# Altium PCB PhoneBLE_v101.PcbDoc
Units mm, origin at the board's own origin, x right, y up, seen from the top; angles counter-clockwise.
Board outline 35 x 20 mm, 2 copper layers (Top Layer, Bottom Layer); 49 components, 39 nets, 227 pads, 111 vias.
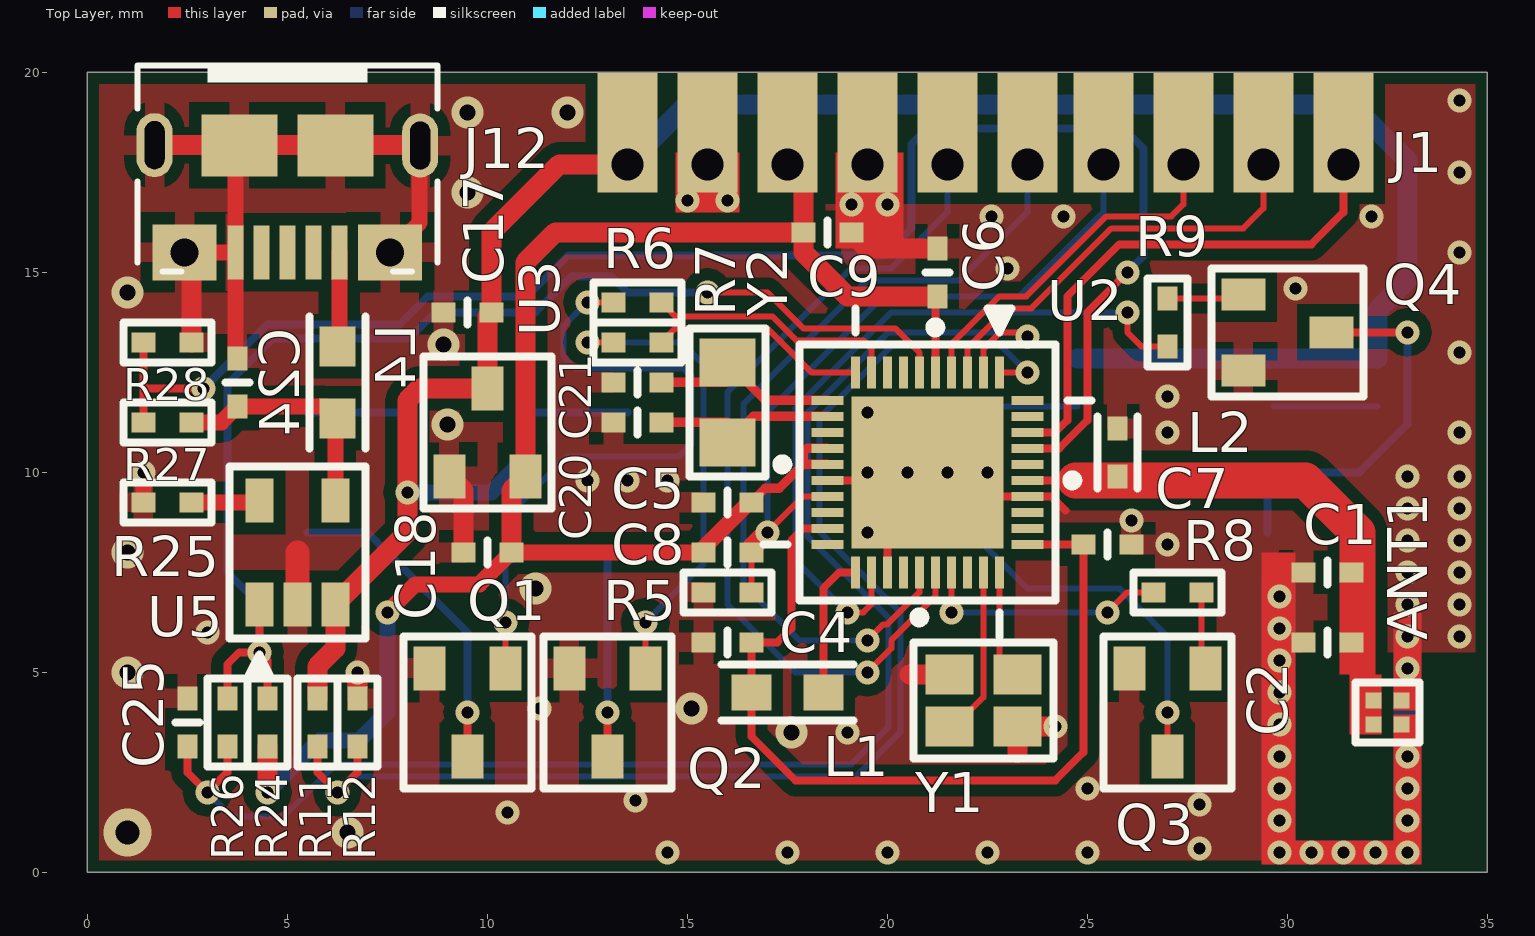
[diagram p0: Top Layer view]
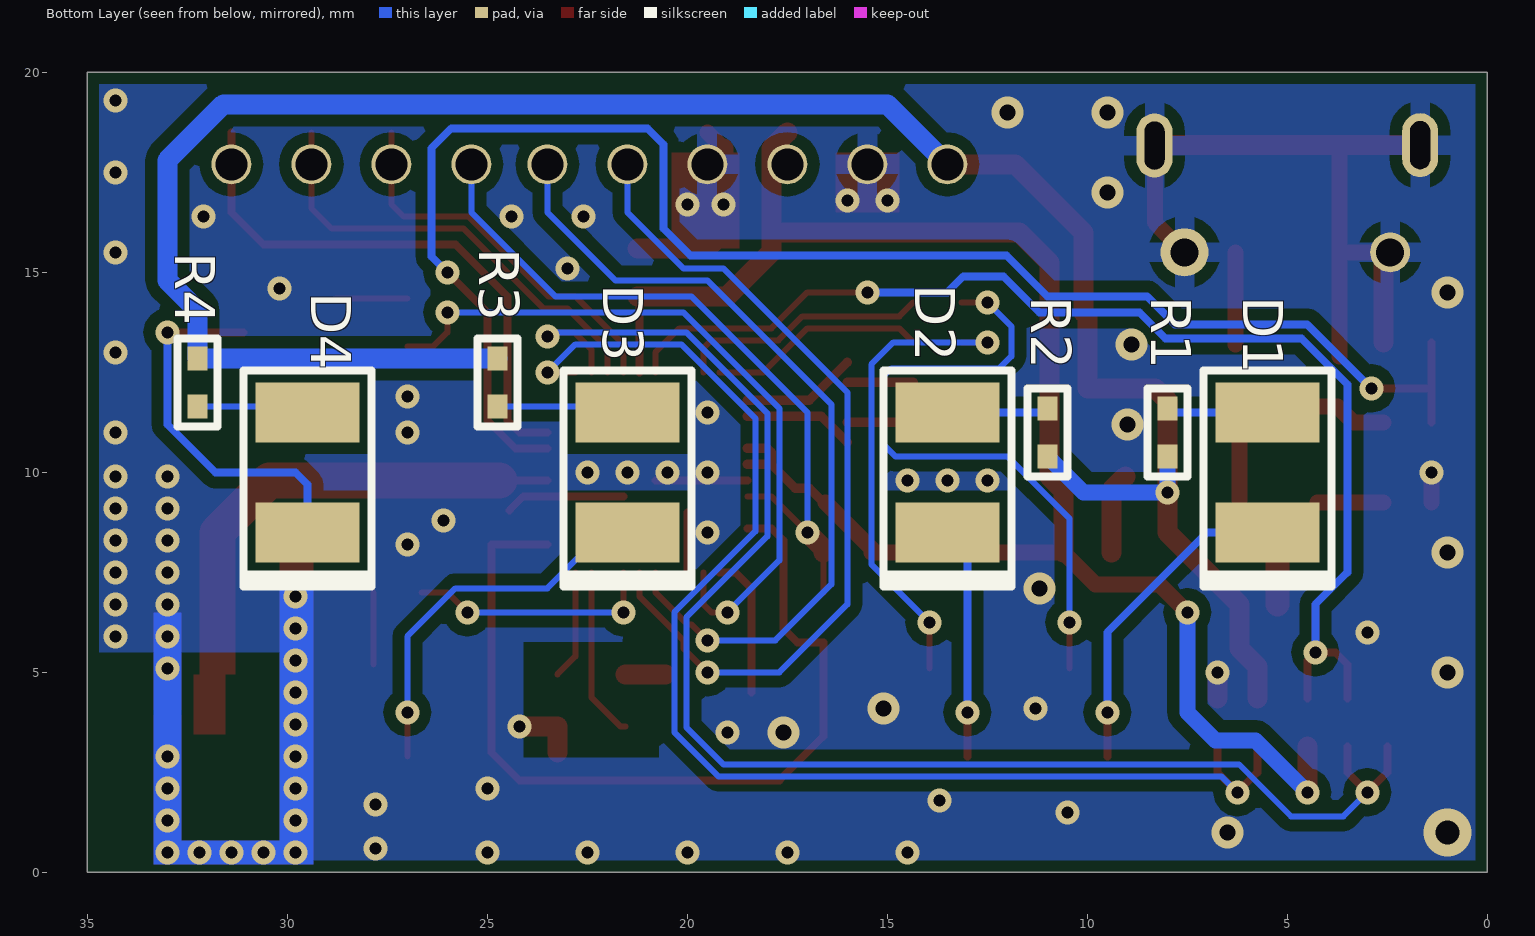
[diagram p1: Bottom Layer view, seen from below]
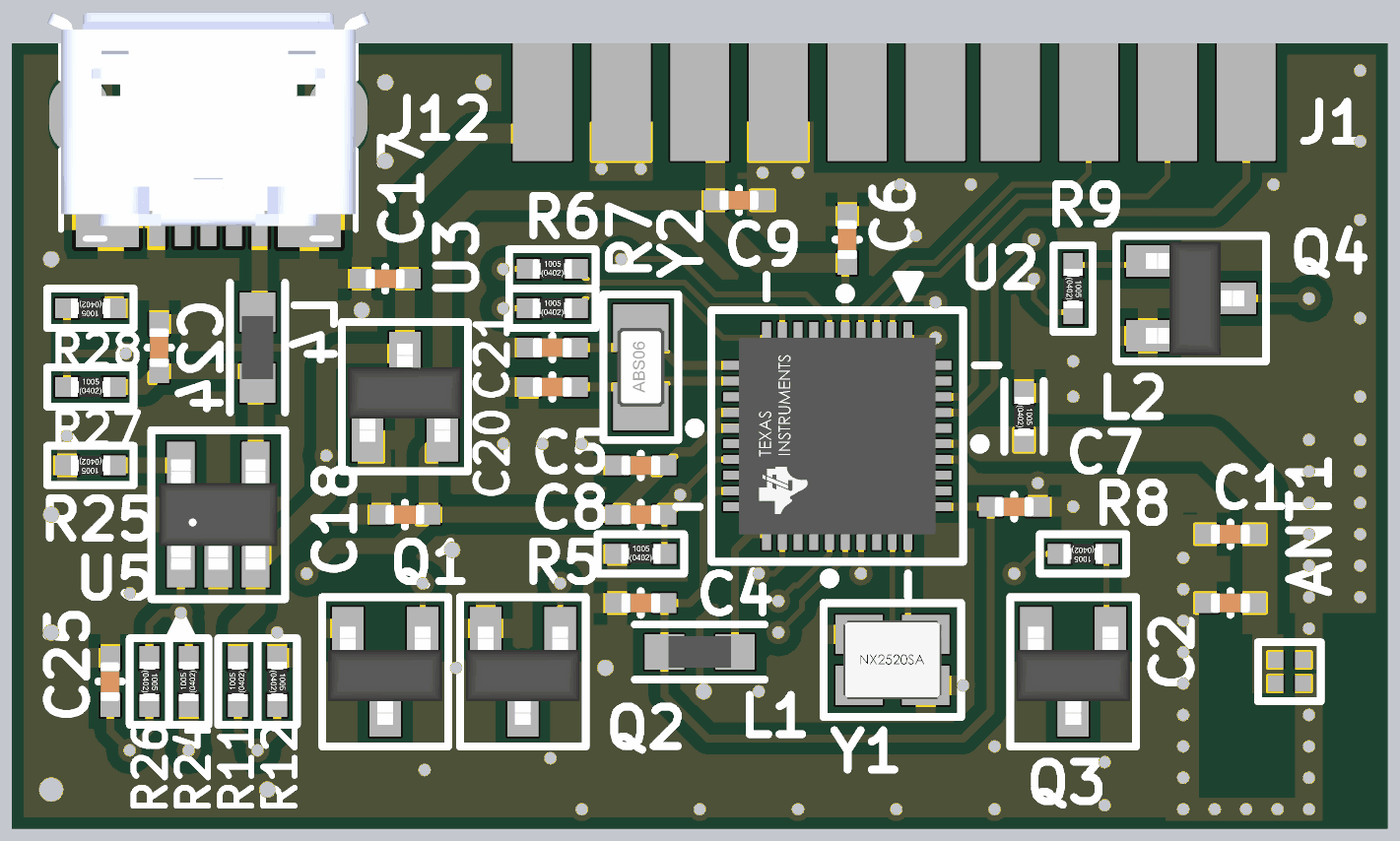
[diagram p2: 3D render of the assembled board from above, using the file's embedded part models]
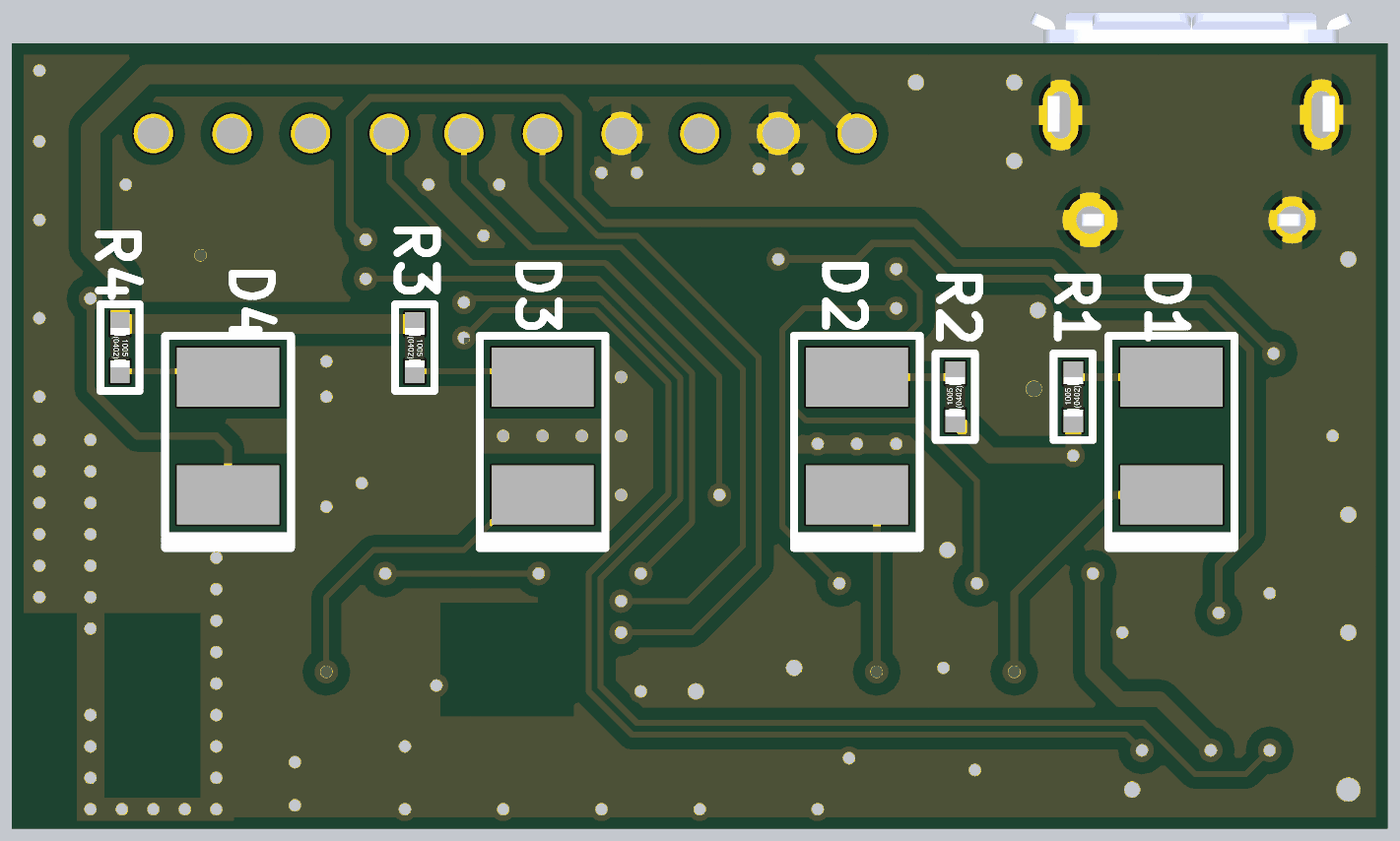
[diagram p3: 3D render of the assembled board from below, using the file's embedded part models]

## Layer stack, top to bottom
Top Layer: signal copper 0.0356
Dielectric: dielectric 0.32, FR-4, Dk 4.8
Bottom Layer: signal copper 0.0356

## Board outline
0,0 35,0 35,20 0,20

## Design rules (kind name [scope] priority, off if disabled: settings)
AssemblyTestPointUsage [All] p1 off:
AssemblyTestpoint [All] p1 off: testpointundercomponent=TRUE minsize=1.016 maxsize=2.54 preferedsize=1.524 minholesize=0 maxholesize=1.016 preferedholesize=0.813 testpointgrid=0.025 usegrid=TRUE gridtolerance=0 allowsidetop=TRUE allowsidebottom=TRUE
Clearance Clearance_Poly [InPoly] p1: gap=0.3
Clearance [All] p2: gap=0.15
ComponentClearance [All] p1 off: gap=0.1 collisioncheckmode=3 verticalgap=0.1 showdistances=FALSE
FabricationTestPointUsage [All] p1 off: valid=0 allowmultiple=FALSE
FabricationTestpoint [All] p1 off: side=3 testpointundercomponent=TRUE minsize=1.016 maxsize=2.54 preferedsize=1.524 minholesize=0 maxholesize=1.016 preferedholesize=0.813 testpointgrid=0.025 allowsidetop=TRUE allowsidebottom=TRUE usegrid=TRUE gridtolerance=0
Height [All] p1 off: minheight=0 maxheight=25.4 prefheight=12.7
HoleSize [All] p1: absolutevalues=TRUE maxlimit=5 minlimit=0.025 maxpercent=80.000 minpercent=20.000
HoleToHoleClearance [All] p1: gap=0.1 allowstackedmicrovias=TRUE
MinimumSolderMaskSliver [All] p1 off: minsoldermaskwidth=0.254
PolygonConnect PolygonConnect_via [IsVia] p1: connectstyle=Direct reliefconductorwidth=0.254 reliefentries=4 polygonreliefangle="90 Angle"
PolygonConnect [All] p2: connectstyle=Relief reliefconductorwidth=0.5 reliefentries=4 polygonreliefangle="90 Angle"
RoutingVias [All] p1: holewidth=0.3 width=0.6 viastyle="Through Hole" minholewidth=0.2 minwidth=0.4 maxholewidth=0.6 maxwidth=1.2
SilkToSilkClearance [All] p1 off: silktosilkclearance=0.254
SilkscreenOverComponentPads [IsPad] p1 off: minsilkscreentomaskgap=0.254
SolderMaskExpansion [All] p1: expansion=0.1
Width [All] p1: maxlimit=5 minlimit=0.05 preferedwidth=0.15
17 further rules are at their usual default settings.

## Components (designator, comment, footprint, x,y, rotation, side; value= is the part's Value field where it differs from the comment)
ANT1 "2450AT07A0100T" ANT1005 32.5,4 r0 top
C1 "NP" C1005 31,7.5 r0 top
C2 "NP" C1005 31,5.75 r0 top
C4 "1uF" C1005 16,5.75 r180 top
C5 "1uF" C1005 16,9.25 r0 top
C6 "100nF" C1005 21.25,15 r270 top
C7 "1uF" C1005 25.5,8.2 r180 top
C8 "1uF" C1005 16,8 r180 top
C9 "100nF" C1005 18.5,16 r180 top
C17 "1uF /6.3V" C1005 9.5,14 r0 top
C18 "1uF /6.3V" C1005 10,8 r0 top
C20 "1.5pF" C1005 13.75,11.25 r0 top
C21 "1.5pF" C1005 13.75,12.25 r0 top
C24 "1uF" C1005 3.75,12.25 r270 top
C25 "10nF" C1005 2.5,3.75 r270 top
D1 "LY T68F-U1AA-46-1-Z" T68F_Z 5.5,10 r270 bottom locked
D2 "LY T68F-U1AA-46-1-Z" T68F_Z 13.5,10 r270 bottom locked
D3 "LY T68F-U1AA-46-1-Z" T68F_Z 21.5,10 r270 bottom locked
D4 "LY T68F-U1AA-46-1-Z" T68F_Z 29.5,10 r270 bottom locked
J1 "TC2050-IDC-NL" SMD-10 22.5,18.5 r180 top locked
J12 "MicroUSB-B" FCI_10118193-0001LF 5,15.5 r270 top
L1 "BRL1608T2R2M" L1608 17.5,4.5 r180 top
L2 "HK10053N9S-T" L1005 25.75,10.5 r270 top
L4 "BLM18AG102SN1D" L1608 6.25,12.25 r270 top
Q1 "BC817" SOT-23 9.5,4 r180 top
Q2 "BC817" SOT-23 13,4 r180 top
Q3 "BC817" SOT-23 27,4 r180 top
Q4 "BC817" SOT-23 30,13.5 r270 top
R1 "470" R1005 8,11 r90 bottom
R2 "470" R1005 11,11 r90 bottom
R3 "470" R1005 24.75,12.25 r270 bottom
R4 "470" R1005 32.25,12.25 r270 bottom
R5 "4.7K" R1005 16,7 r0 top
R6 "470" R1005 13.75,14.25 r0 top
R7 "470" R1005 13.75,13.25 r0 top
R8 "470" R1005 27.25,7 r180 top
R9 "470" R1005 27,13.75 r270 top
R11 "2K" R1005 5.75,3.75 r90 top
R12 "3K" R1005 6.75,3.75 r270 top
R24 "330" R1005 4.5,3.75 r90 top
R25 "1.65K" R1005 2,9.25 r180 top
R26 "10K" R1005 3.5,3.75 r270 top
R27 "2K" R1005 2,11.25 r0 top
R28 "3K" R1005 2,13.25 r180 top
U2 "DA14583_QFN40" QFN40 21,10 r180 top locked
U3 "XC6206P332MR" SOT-23 10,11 r0 top
U5 "TP4054" SOT23-5 5.25,8 r0 top locked
Y1 "16MHz" SMD2520-4 22.4,4.3 r0 top
Y2 "32.768kHz" XTAL2012 16,11.75 r90 top

## Footprints (in the part's own frame and the unit in brackets; to place one, negate y for a bottom-side part, rotate by r counter-clockwise, add the part's x,y. Pads: shape width x height; smd on the part's side, far side on the other; paste and mask are expansions set on the pad)
ANT1005 [mm]
  rect 0.4x0.4 smd paste+0 mask+0.05: 1(-0.35,-0.3) 2(0.35,-0.3) 3(0.35,0.3) 4(-0.35,0.3)
  round 0.2 on Mech4 paste-10 mask-10: ""(0,0)
  silkscreen extent -0.8,-0.75 0.8,0.75, body extent -0.5,-0.3 0.5,0.3, height 0.5
C1005 [mm]
  rect 0.6x0.5 smd paste+0 mask+0.05: 1(-0.6,0) 2(0.6,0)
  round 0.2 on Mech4 paste-10 mask-10: ""(0,0)
  silkscreen extent 0,-0.3 0,0.3, body extent -0.5,-0.25 0.5,0.25, height 0.25
FCI_10118193-0001LF [mm]
  rect 1.35x0.4 smd: 1(0,1.3) 2(0,0.65) 3(0,0) 4(0,-0.65) 5(0,-1.3)
  oval 1.6x0.9 hole 0.5 slot 1.2 at 0 deg: 6(-2.68,-3.32) 6(-2.67,3.32)
  oval 2x1.5 on Top Paste: 6(-2.675,3.3) 6(-2.675,-3.3)
  rect 1.55x1.9 smd: 6(-2.675,1.2) 6(-2.675,-1.2)
  rect 1.4x1.6 smd: 6(0,-2.57) 6(0,2.57)
  round 1 hole 0.7: 6(0,-2.57)
  round 1.2 hole 0.7: 6(0,2.57)
  silkscreen extent -4.75,-3.75 0.48,3.75, body extent -5.28,-4.1 0.15,4.1, height 2.72
L1005 [mm]
  rect 0.6x0.5 smd paste+0 mask+0.05: 1(-0.6,0) 2(0.6,0)
  round 0.2 on Mech4 paste-10 mask-10: ""(0,0)
  silkscreen extent -0.9,-0.5 0.9,0.5, body extent -0.5,-0.25 0.5,0.25, height 0.35
L1608 [mm]
  rect 1x0.9 smd paste+0 mask+0.05: 1(-0.9,0) 2(0.9,0)
  round 0.2 on Mech4 paste-10 mask-10: ""(0,0)
  silkscreen extent -1.65,-0.7 1.65,0.7, body extent -0.8,-0.4 0.8,0.4, height 0.6
QFN40 [mm]
  rect 0.225x0.8 smd paste+0 mask+0.05: 1(-1.8,-2.5) 2(-1.4,-2.5) 3(-1,-2.5) 4(-0.6,-2.5) 5(-0.2,-2.5) 6(0.2,-2.5) 7(0.6,-2.5) 8(1,-2.5) 9(1.4,-2.5) 10(1.8,-2.5) 21(1.8,2.5) 22(1.4,2.5) 23(1,2.5) 24(0.6,2.5) 25(0.2,2.5) 26(-0.2,2.5) 27(-0.6,2.5) 28(-1,2.5) 29(-1.4,2.5) 30(-1.8,2.5)
  rect 0.8x0.225 smd paste+0 mask+0.05: 11(2.5,-1.8) 12(2.5,-1.4) 13(2.5,-1) 14(2.5,-0.6) 15(2.5,-0.2) 16(2.5,0.2) 17(2.5,0.6) 18(2.5,1) 19(2.5,1.4) 20(2.5,1.8) 31(-2.5,1.8) 32(-2.5,1.4) 33(-2.5,1) 34(-2.5,0.6) 35(-2.5,0.2) 36(-2.5,-0.2) 37(-2.5,-0.6) 38(-2.5,-1) 39(-2.5,-1.4) 40(-2.5,-1.8)
  rect 3.8x3.8 smd paste+0 mask+0.05: 41(0,0)
  round 0.2 on Mech4 paste-10 mask-10: ""(0,0)
  silkscreen extent -4.1,-4.1 4.1,4.1, body extent -2.5,-2.5 2.5,2.5, height 0.73
R1005 [mm]
  rect 0.6x0.5 smd paste+0 mask+0.05: 1(-0.6,0) 2(0.6,0)
  round 0.2 on Mech4 paste-10 mask-10: ""(0,0)
  silkscreen extent -1.1,-0.5 1.1,0.5, body extent -0.5,-0.25 0.5,0.25, height 0.35
SMD2520-4 [mm]
  rect 1.2x1 smd paste+0 mask+0.05: 1(-0.85,-0.65) 2(0.85,-0.65) 3(0.85,0.65) 4(-0.85,0.65)
  round 0.2 on Mech4 paste-10 mask-10: ""(0,0)
  silkscreen extent -1.75,-1.45 1.75,1.45, body extent -1.25,-1 1.25,1, height 0.45
SMD-10 [mm]
  rect 1.5x3 smd paste+0 mask+0.05: 1(-8.9,0) 2(-6.9,0) 3(-4.9,0) 4(-2.9,0) 5(-1,0) 6(1,0) 7(3,0) 8(5,0) 9(7,0) 10(9,0)
  round 1 hole 0.8 paste-10 mask+0.05: 1(-8.9,0.8) 2(-6.9,0.8) 3(-4.9,0.8) 4(-2.9,0.8) 5(-1,0.8) 6(1,0.8) 7(3,0.8) 8(5,0.8) 9(7,0.8) 10(9,0.8)
SOT23-5 [mm]
  rect 0.7x1.1 smd paste+0 mask+0.05: 1(-0.95,-1.3) 2(0,-1.3) 3(0.95,-1.3) 4(0.95,1.3) 5(-0.95,1.3)
  round 0.2 on Mech4 paste-10 mask-10: ""(0,0)
  silkscreen extent -1.7,-3.15 1.7,2.15, body extent -1.5,-1.4 1.5,1.4, height 1.21
SOT-23 [mm]
  rect 0.8x1.1 smd paste+0 mask+0.05: 1(-0.95,-1.1) 2(0.95,-1.1) 3(0,1.1)
  round 0.2 on Mech4 paste-10 mask-10: ""(0,0)
  silkscreen extent -1.6,-1.9 1.6,1.9, body extent -1.45,-1.15 1.45,1.35, height 1.1
T68F_Z [mm]
  rect 1.5x2.6 smd paste+0 mask+0.05: A(-1.5,0) K(1.5,0)
  round 0.2 on Mech4 paste-10 mask-10: ""(0,0)
  silkscreen extent -2.55,-1.6 2.85,1.6
XTAL2012 [mm]
  rect 1.2x1.4 smd paste+0 mask+0.05: 1(-1,0) 2(1,0)
  round 0.2 on Mech4 paste-10 mask-10: ""(0,0)
  silkscreen extent -1.85,-0.95 1.85,0.95, body extent -1,-0.6 1,0.59, height 0.61

## Via types
v1: diameter 0.6, hole 0.3, Top Layer to Bottom Layer, 98 vias
v2: diameter 0.8, hole 0.4, Top Layer to Bottom Layer, 12 vias
v3: diameter 1.2, hole 0.6, Top Layer to Bottom Layer, 1 vias

## Nets (pads, with @x,y where several pads share a name; then routed paths per layer and width w, separated by ;. In a path a pad name is that pad's centre, name@x,y a point inside that pad or via, vN(x,y) a via of type N, cw(c..) or ccw(c..) an arc to the next point about the centre after c; other vN are vias at no path point)
CHG_DRV: C25.2 R26.2 U2.2 | length 37.8
  Top Layer w0.15: U2.2 22.4,13.076 22.824,13.5 v1@23.5,13.5
  Top Layer w0.2: C25.2 2.5,2.5 v1(3,2) 3.5,2.5 R26.2
  Bottom Layer w0.15: v1(3,2) 3.6,1.4 4.908,1.4 6.208,2.7 19.1,2.7 20.025,3.625 20.025,6.375 18,8.4 18,11.476 20.024,13.5 v1@23.5,13.5
  other v1: 23.5,13.4
CHG_FULL: R24.2 R26.1 U2.6 U5.1 | length 30.9
  Top Layer w0.15: v1(15.5,14.5) 17,14.5 17.9,13.6 20.2,13.6 20.8,13 U2.6
  Top Layer w0.2: R26.1 3.5,5.2 3.8,5.5 v1(4.3,5.5) ; U5.1 v1(4.3,5.5) ; R24.2 4.5,5.3 v1(4.3,5.5)
  Bottom Layer w0.2: v1(4.3,5.5) 4.3,6.7 3.5,7.5 3.5,12.2 4.65,13.35 8.05,13.35 8.7,14 11.2,14 12.1,14.9 13.1,14.9 13.5,14.5 v1(15.5,14.5)
GND: ANT1.2 ANT1.3 C1.1 C2.1 C4.2 C5.1 C6.1 C7.1 C9.1 C17.1 C18.1 C20.1 C21.1 C24.1 C25.1 J1.7 J1.9 J12.5 J12.6@1.68,18.18 J12.6@2.43,15.5 J12.6@3.8,18.175 J12.6@6.2,18.175 J12.6@7.57,15.5 J12.6@8.32,18.17 L2.1 Q1.2 Q2.2 Q3.2 Q4.2 R5.1 R12.1 R25.2 R28.1 U2.16 U2.23 U2.34 U2.41 U3.1 U5.2 Y1.2 Y1.4 | length 37.3
  Top Layer w0.2: U2.16 U2.41@20.8,9.8 ; U2.23 U2.41@20,9 ; U2.41@21.6,9.4 U2.34 24.1,9.4 24.45,9.05
  Top Layer w0.4: R25.2 v1(1.4,10) ; J12.6@2.43,15.5 J12.5 ; C24.1@3.7,12.9 J12.5 ; J12.6@3.7,18.075 J12.5 ; J12.6@7.57,15.5 8.31,16.24 J12.6@8.31,18.18 ; J1.7@19.1,18.1 J1.7@19.5,18.5
  Top Layer w0.5: J12.6@1.68,18.18 J12.6@8.31,18.18 ; R28.1 J12.6@2.6,15.33 ; R12.1 v1(6.75,5) ; U3.1 9.4,9.55 C18.1 ; J1.7@19.1,18.1 C9.1 19.5,15.6 C6.1 ; 20.55,4.95 Y1.4 ; 23.25,3 Y1.2 v1(24.2,3.65)
  Top Layer w0.6: U5.2 5.25,8
  other v1: 14.5,0.5 17.5,0.5 20,0.5 22.5,0.5 25,0.5 29.8,0.5 30.6,0.5 31.4,0.5 32.2,0.5 33,0.5 27.8,0.6 29.8,1.3 33,1.3 10.5,1.5 27.8,1.7 13.7,1.8 25,2.1 29.8,2.1 33,2.1 29.8,2.9 33,2.9 19,3.5 29.8,3.7 11.3,4.1 29.8,4.5 33,5.1 29.8,5.3 33,5.9 34.3,5.9 3,6 29.8,6.1 33,6.7 34.3,6.7 29.8,6.9 33,7.5 34.3,7.5 27,8.2 33,8.3 34.3,8.3 19.5,8.5 26.1,8.8 33,9.1 34.3,9.1 12.5,9.8 13.5,9.8 14.5,9.8 33,9.9 34.3,9.9 19.5,10 20.5,10 21.5,10 22.5,10 27,11 34.3,11 19.5,11.5 27,11.9 34.3,13 30.2,14.6 23,15.1 34.3,15.5 22.6,16.4 24.4,16.4 32.1,16.4 19.1,16.7 20,16.7 15,16.8 16,16.8 34.3,17.5 34.3,19.3
  other v2: 6.5,1 17.6,3.5 15.1,4.1 1,5 11.2,7.1 1,8 9,11.2 8.9,13.2 1,14.5 9.5,17 9.5,19 12,19
  other v3: 1,1
LED1: R6.2 U2.9 | length 6.3
  Top Layer w0.15: R6.2 14.7,13.9 17.124,13.9 17.724,13.3 19.4,13.3 19.6,13.1 U2.9
LED2: R7.2 U2.10 | length 5.5
  Top Layer w0.15: R7.2 14.7,13.6 17,13.6 18.1,12.5 U2.10
LED3: R8.2 U2.27 | length 6.3
  Top Layer w0.15: v1(21.6,6.5) U2.27 ; v1(25.5,6.5) 26,7 R8.2
  Bottom Layer w0.15: v1(21.6,6.5) v1(25.5,6.5)
LED4: R9.2 U2.22 | length 18.1
  Top Layer w0.15: v1(19,6.5) 19.4,6.5 19.6,6.7 U2.22 ; v1(26,14) 26,13.5 26.35,13.15 R9.2
  Bottom Layer w0.15: v1(19,6.5) 17.7,7.8 17.7,11.6 20.1,14 v1(26,14)
NetC4_1: C4.1 C7.2 L1.2 U2.19 U2.31 | length 22.4
  Top Layer w0.2: U2.19 17.9,8.6 17.6,8.3 17.6,6.1 17.25,5.75 C4.1 L1.2 16.6,3.4 17.7,2.3 24.2,2.3 24.9,3 C7.2 U2.31
NetC20_2: C20.2 U2.12 Y2.1 | length 4.4
  Top Layer w0.23: C20.2 Y2.1@16,11.25 ; Y2.1 16.65,11.4 U2.12
NetC21_2: C21.2 U2.11 Y2.2 | length 4.5
  Top Layer w0.23: C21.2 Y2.2@16,12.25 ; Y2.2 16.95,11.8 U2.11
NetC24_2: C24.2 L4.2 R27.2 U5.4 | length 5.9
  Top Layer w0.4: R27.2 3.35,11.25 C24.2 5.95,11.65 L4.2 ; U5.4 L4.2@6.2,11.3
NetD1_A: D1.A R1.2 | length 2.4
  Bottom Layer w0.2: D1.A R1.2@7.9,11.5
NetD1_K: D1.K Q1.3 | length 8.1
  Top Layer w0.2: Q1.3 v1(9.5,4)
  Bottom Layer w0.2: D1.K 7,8.5 9.5,6 v1(9.5,4)
NetD2_A: D2.A R2.2 | length 2.5
  Bottom Layer w0.2: R2.2@11,11.5 D2.A
NetD2_K: D2.K Q2.3 | length 5.1
  Top Layer w0.2: Q2.3 v1(13,4)
  Bottom Layer w0.2: v1(13,4) D2.K@13,8
NetD3_A: D3.A R3.2 | length 3.1
  Bottom Layer w0.15: D3.A@21.65,11.65 R3.2
NetD3_K: D3.K Q3.3 | length 9.6
  Top Layer w0.15: Q3.3 v1(27,4)
  Bottom Layer w0.15: D3.K 22.1,8.5 23.5,7.1 25.8,7.1 27,5.9 v1(27,4)
NetD4_A: D4.A R4.2 | length 2.6
  Bottom Layer w0.15: D4.A@29.65,11.65 R4.2
NetD4_K: D4.K Q4.3 | length 9.5
  Top Layer w0.2: Q4.3 v1(33,13.5)
  Bottom Layer w0.2: D4.K 29.5,9.7 29.8,10 31.8,10 33,11.2 v1(33,13.5)
NetJ12_1: J12.1 L4.1 | length 2.3
  Top Layer w0.4: L4.1@6.3,13.2 J12.1
NetL1_1: L1.1 U2.21 | length 3.6
  Top Layer w0.2: L1.1 18.4,7.1 18.8,7.5 U2.21
NetQ1_1: Q1.1 R6.1 | length 16.5
  Top Layer w0.15: Q1.1 v1(10.45,6.25) ; v1(12.5,14.25) R6.1
  Bottom Layer w0.15: v1(10.45,6.25) 10.45,8.85 12,10.4 14.8,10.4 15.1,10.7 15.1,12.4 14.9,12.6 12.2,12.6 11.9,12.9 11.9,13.65 v1(12.5,14.25)
NetQ2_1: Q2.1 R7.1 | length 12
  Top Layer w0.15: v1(12.5,13.25) R7.1 ; Q2.1 v1(13.95,6.25)
  Bottom Layer w0.15: v1(12.5,13.25) 14.85,13.25 15.4,12.7 15.4,7.7 v1(13.95,6.25)
NetQ3_1: Q3.1 R8.1 | length 1.8
  Top Layer w0.15: Q3.1@27.85,5.2 R8.1
NetQ4_1: Q4.1 R9.1 | length 1.8
  Top Layer w0.15: R9.1 Q4.1@28.8,14.35
NetR25_1: R25.1 U5.5 | length 1.6
  Top Layer w0.4: R25.1 U5.5@4.25,9.25
NetU2_29: U2.29 Y1.1 | length 4.3
  Top Layer w0.15: Y1.1 21.675,3.65 22.4,4.375 U2.29
NetU2_30: U2.30 Y1.3 | length 2.7
  Top Layer w0.15: U2.30 22.8,5.4 Y1.3
PLUG_IN: R27.1 R28.2 U2.37 | length 40.3
  Top Layer w0.2: R27.1 1.4,12.1 ; R28.2 1.4,12.1 ; v1(2.9,12.1) 1.4,12.1 ; U2.37 24.3,10.6 25,11.3 25,14 v1(26,15)
  Bottom Layer w0.2: v1@2.903,12.097 4.505,13.7 7.809,13.7 8.509,14.4 11,14.4 12.025,15.425 19.925,15.425 20.6,16.1 20.6,18.2 21,18.6 25.9,18.6 26.4,18.1 26.4,15.4 v1(26,15)
RFIOP: ANT1.1 ANT1.4 C1.2 C2.2 L2.2 U2.35 | length 10.7
  Top Layer w0.2: U2.35 24.7,9.8
  Top Layer w0.9: 24.7,9.8 30.45,9.8 31.75,8.5 31.75,6.55
RST: C8.1 J1.4 R5.2 U2.17 | length 18.2
  Top Layer w0.15: R5.2 C8.1 ; v1(17,8.5) 17.9,9.4 U2.17
  Top Layer w0.5: C8.1 16.6,8.1 v1(17,8.5)
  Bottom Layer w0.15: v1(17,8.5) 17,11.5 19.9,14.4 23.3,14.4 25.4,16.5 J1.4@25.4,17.7
SWCLK: J1.6 U2.26 | length 21.3
  Top Layer w0.15: v1(19.5,5) 20.1,5.6 20.1,5.8 21.2,6.9 U2.26
  Bottom Layer w0.15: v1(19.5,5) 17.7,5 16,6.7 16,12 19.1,15.1 20.1,15.1 21.5,16.5 J1.6@21.5,17.7
SWDIO: J1.5 U2.25 | length 20.8
  Top Layer w0.15: v1(19.5,5.8) 19.9,6.2 20,6.2 20.8,7 U2.25
  Bottom Layer w0.15: v1(19.5,5.8) 17.8,5.8 16.4,7.2 16.4,11.7 19.5,14.8 21.8,14.8 23.5,16.5 J1.5@23.5,17.7
URX: J1.3 U2.4 | length 9.7
  Top Layer w0.15: U2.4 21.6,13.2 22.8,14.4 23.476,14.4 25.476,16.4 27.1,16.4 27.4,16.7 27.4,17.7 J1.3@27.4,18.5
UTX: J1.2 U2.3 | length 11.3
  Top Layer w0.15: U2.3 22,13.1 23,14.1 23.6,14.1 25.6,16.1 28.9,16.1 29.4,16.6 29.4,17.7 J1.2@29.4,18.5
VBAT_SEN: R11.1 R12.2 U2.1 | length 33.1
  Top Layer w0.15: U2.1 v1(23.5,12.5)
  Top Layer w0.2: R11.1 5.75,2.5 v1(6.25,2) 6.75,2.5 R12.2
  Bottom Layer w0.15: v1(6.25,2) 6.65,2.4 19.224,2.4 20.325,3.501 20.325,6.499 18.3,8.524 18.3,11.351 20.149,13.2 22.8,13.2 v1(23.5,12.5)
VCC_3V3: C5.2 C6.2 C8.2 C9.2 C18.2 J1.8 R24.1 U2.5 U2.14 U2.15 U3.2 | length 44.4
  Top Layer w0.2: U2.5 C6.2@21.2,14.4
  Top Layer w0.23: C5.2@16.55,9.25 C5.2 16.95,9.6 17.3,9.6 17.9,10.2 ; U2.15 17.9,10.2 ; U2.14 18,10.6 17.9,10.5 17.9,10.2
  Top Layer w0.4: v1(7.5,6.5) 8.2,7.2 9.8,7.2 C18.2 C8.2 ; C8.2@15.4,8.1 C5.2@16.55,9.25
  Top Layer w0.5: v1(4.5,2) R24.1 ; C18.2 10.6,9.55 U3.2 10.95,15.25 11.7,16 C9.2 ; J1.8@17.5,18.5 17.9,18.1 C9.2 ; C6.2 21.2,14.4 19,14.4 17.9,15.5 C9.2
  Bottom Layer w0.4: v1(4.5,2) 5.8,3.3 6.8,3.3 7.5,4 v1(7.5,6.5)
VCC_BAT: C17.2 J1.10 R1.1 R2.1 R3.1 R4.1 R11.2 U3.3 U5.3 | length 56.1
  Top Layer w0.5: R11.2 5.75,5.15 6.2,5.6 U5.3 8,8.5 v1(8,9.5) 8,11.8 8.3,12.1 U3.3 C17.2@10,13.9 ; C17.2 10.1,16 11.8,17.7 J1.10@13.5,17.7
  Bottom Layer w0.4: R1.1 v1(8,9.5) 10.1,9.5 R2.1
  Bottom Layer w0.5: J1.10@13.5,17.7 15,19.2 31.6,19.2 33,17.8 33,14.8 32.25,14.05 R4.1 R3.1
VPP: J1.1 U2.38 | length 14
  Top Layer w0.2: U2.38 24.2,11 24.5,11.3 24.5,14.4 25.8,15.7 30.6,15.7 31.4,16.5 31.4,17.7 J1.1@31.4,18.5
pads on no net: ANT1. C1. C2. C4. C5. C6. C7. C8. C9. C17. C18. C20. C21. C24. C25. D1. D2. D3. D4. J12.2 J12.3 J12.4 J12.6@1.7,18.175 J12.6@8.3,18.175 L1. L2. L4. Q1. Q2. Q3. Q4. R1. R2. R3. R4. R5. R6. R7. R8. R9. R11. R12. R24. R25. R26. R27. R28. U2. U2.7 U2.8 U2.13 U2.18 U2.20 U2.24 U2.28 U2.32 U2.33 U2.36 U2.39 U2.40 U3. U5. Y1. Y2.

## Polygon pours and split planes (outlines as drawn)
GND on Top Layer "Top Layer-No Net" (solid, remove dead copper): 0.3,0.3 30,0.3 30,5.5 34.7,5.5 34.7,19.7 0.3,19.7 0.3,0.3
GND on Bottom Layer "Top Layer-No Net" (solid, remove dead copper): 0.3,0.3 30,0.3 30,5.5 34.7,5.5 34.7,19.7 0.3,19.7 0.3,0.3

## Other copper
Top Layer:
  rectangle net GND: 14.7,16.5 16.3,18
  rectangle net GND: 18.7,15.6 20.4,18
  rectangle net GND: 29.35,0.2 33.3,0.8
  region net GND: 29.35,8 29.35,0.2 30.2,0.2 30.2,8
  region net RFIOP: 31.3,6.95 31.3,4.95 32.2,4.95 32.2,6.95
  region net RFIOP: 31.65,6.95 31.65,3.45 32.1,3.45 32.1,6.95
  region net RFIOP: 31.55,4.95 31.55,3.45 32.35,3.45 32.35,4.95
  region net GND: 33.35,4.05 33.35,6.5 32.65,6.5 32.65,4.05
  region net GND: 32.65,3.95 32.65,0.2 33.35,0.2 33.35,3.95
  pour cut-out: 15.15,13.5 16.9,13.5 16.9,10.05 16.85,10 15.15,10
  pour cut-out: 30.2,0.8 30.2,5.5 32.7,5.5 32.7,0.8
  pour cut-out: 20.7,2.9 24.1,2.9 24.1,5.8 20.7,5.8
Bottom Layer:
  region net GND: 32.65,3.95 32.65,0.2 33.35,0.2 33.35,3.95
  region net GND: 33.35,3.7 33.35,6.5 32.65,6.5 32.65,3.7
  region net GND: 29.35,7.3 29.35,0.2 30.2,0.2 30.2,7.3
  rectangle net GND: 29.35,0.2 33.3,0.8
  pour cut-out: 20.704,2.864 24.104,2.864 24.104,5.764 20.704,5.764

## Silkscreen, mask and mechanical layers (free items; w line width, h text height)
Mechanical 1:
  the board outline again, w0.1